# Altium PCB PCB1.PcbDoc
Units mil, origin at the board's own origin, x right, y up, seen from the top; angles counter-clockwise.
Board outline 1490 x 400 mil, 2 copper layers (Top Layer, Bottom Layer); 9 components, 7 nets, 33 pads, 2 vias.
Unrouted connection lines stored in the file: 2.
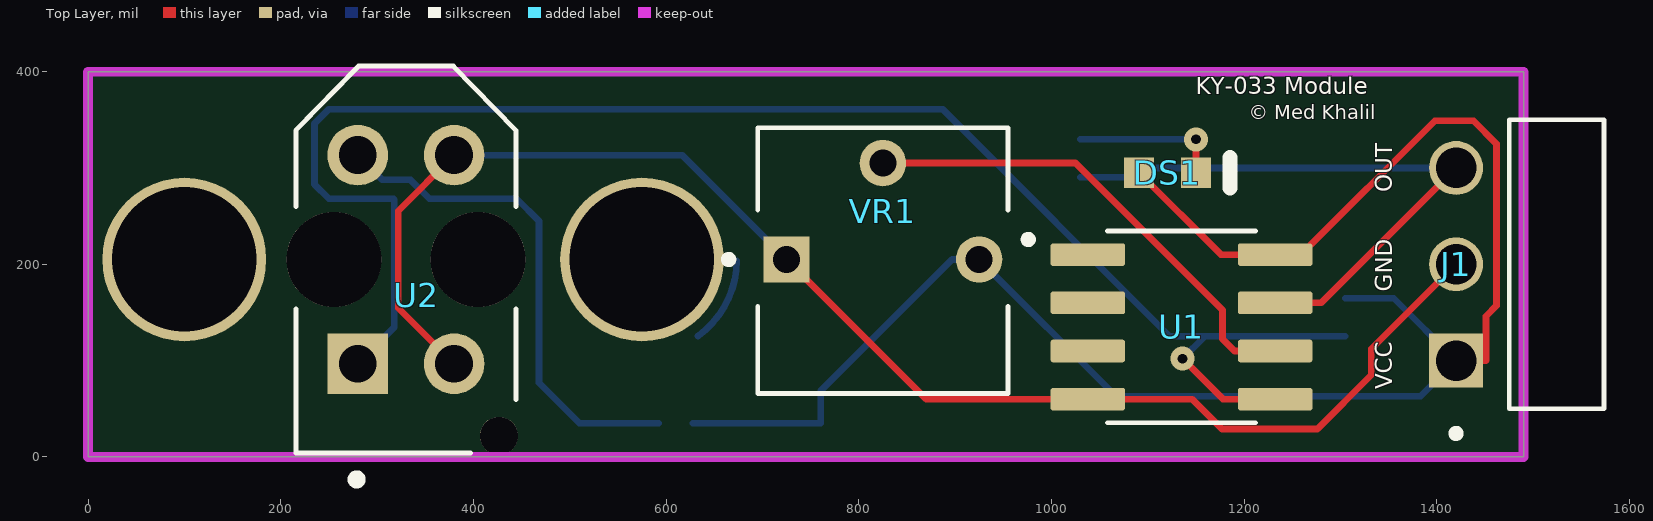
[diagram p0: Top Layer view]
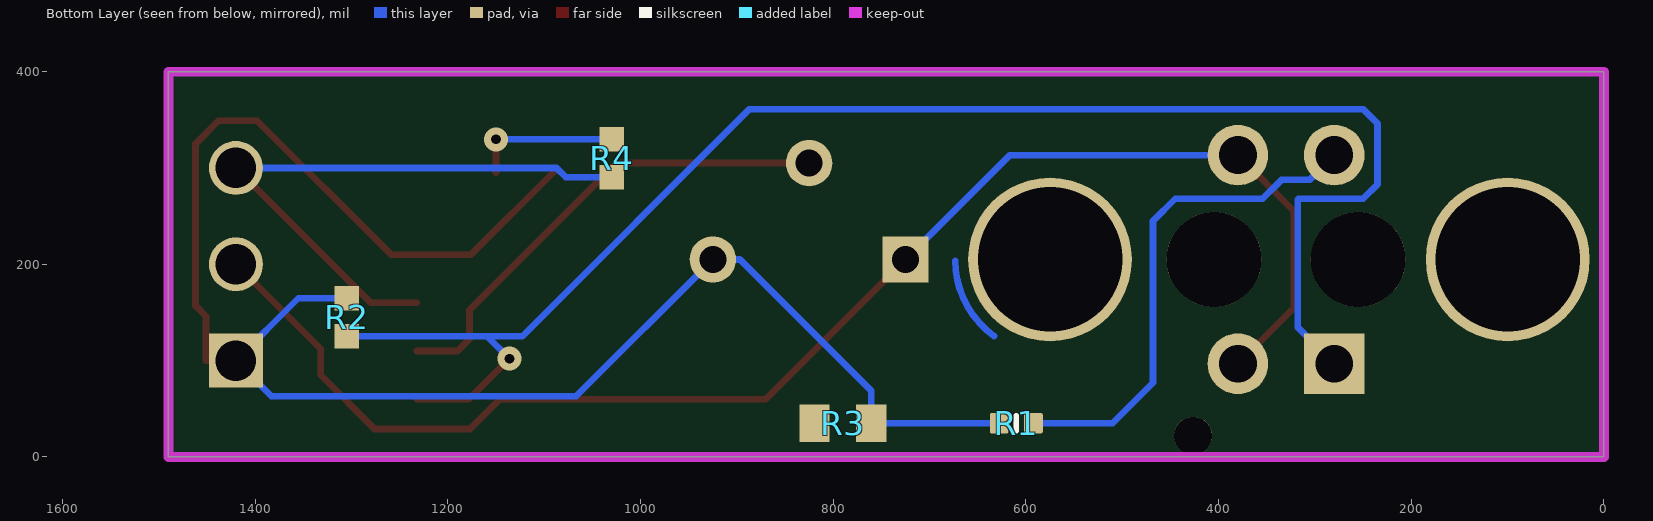
[diagram p1: Bottom Layer view, seen from below]
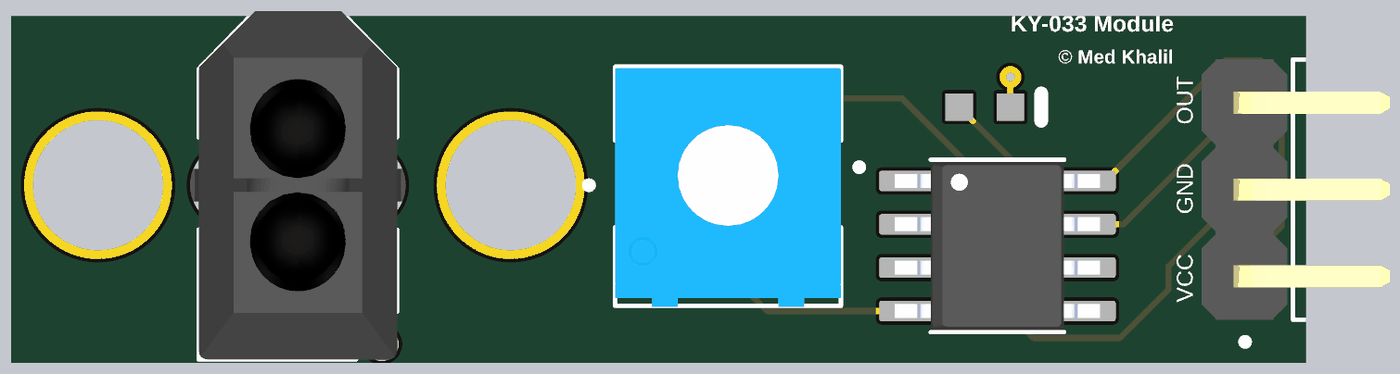
[diagram p2: 3D render of the assembled board from above, using the file's embedded part models]
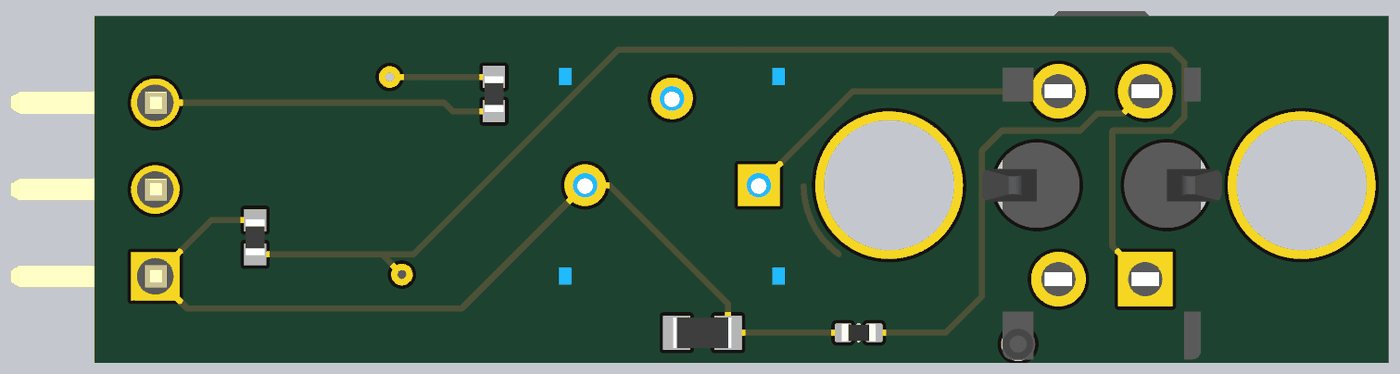
[diagram p3: 3D render of the assembled board from below, using the file's embedded part models]

## Layer stack, top to bottom
Top Solder: solder mask 0.4, Solder Resist, Dk 3.5
Top Layer: signal copper 1.4
Dielectric 1: dielectric 12.6, FR-4, Dk 4.8
Bottom Layer: signal copper 1.4
Bottom Solder: solder mask 0.4, Solder Resist, Dk 3.5

## Board outline
0,0 0,400 1490,400 1490,0

## Design rules (kind name [scope] priority, off if disabled: settings)
Clearance [All] p1: gap=10 ignorepadtopadclearanceinfootprint=FALSE
PolygonConnect [All] p1: connectstyle=Relief reliefconductorwidth=10 reliefentries=4 polygonreliefangle="90 Angle" airgapwidth=10
RoutingVias [All] p1: holewidth=10 width=25 viastyle="Through Hole" minholewidth=10 minwidth=25 maxholewidth=10 maxwidth=25
SolderMaskExpansion [All] p1: expansion=4 istentingtop=FALSE
SupplyNets "Schematic Supply Nets_1" [InNet('VCC')] p1: voltage=0.000
SupplyNets "Schematic Supply Nets" [InNet('GND')] p2: voltage=0.000
Width [All] p1: maxlimit=7 minlimit=7 preferedwidth=7 minimp=50.000000 maximp=50.000000 favimp=50.000000
30 further rules are at their usual default settings.

## Components (designator, comment, footprint, x,y, rotation, side; value= is the part's Value field where it differs from the comment)
DS1 "LTST-C190GKT" LTST-C190GKT_V 1120.47,295 r0 top
J1 "THS-03-R-RAF" VALCON_THS-03-R-RAF 1420,200 r270 top
R1 "Resistor 100R +/-1 % 0402 63 mW" RESC0402(1005)_L 610,35 r180 bottom value=100
R2 "Resistor 100k +/-1% 0402 63 mW" RESC1005X40X25ML05T05 1305,145 r90 bottom value=100k
R3 "Resistor 10k +/-1% 0603 100 mW" RESC1608X55X25ML10T15 790,35 r180 bottom value=10k
R4 "Resistor 1k +/-1% 0402 100 mW" RESC1005X40X25ML05T05 1030,310 r90 bottom value=1k
U1 "LM393D" SOIC127P599X175-8N 1135,135 r0 top
U2 "TCRT5000L" XDCR_TCRT5000L 330,205 r90 top
VR1 "3362P-1-103LF" TRIM_3362P-1-103LF 825,205 r0 top

## Footprints (in the part's own frame and the unit in brackets; to place one, negate y for a bottom-side part, rotate by r counter-clockwise, add the part's x,y. Pads: shape width x height; smd on the part's side, far side on the other; paste and mask are expansions set on the pad)
LTST-C190GKT_V [mm] "SMD, 2-Leads, Body 1.6x0.8mm"
  rect 0.8x0.8 smd: 1(-0.75,0) 2(0.75,0)
  silkscreen extent 1.65,-0.4 1.65,0.4, body extent -0.8,-0.4 0.8,0.4, height 0.9
RESC0402(1005)_L [mm] "Chip Resistor, Body 1.0x0.5mm, IPC High Density"
  rrect25% 0.5x0.55 smd: 1(-0.45,0) 2(0.45,0)
  silkscreen extent 0,-0.2 0,0.2, body extent -0.5,-0.25 0.5,0.25, height 0.3
RESC1005X40X25ML05T05 [mm] "Chip Resistor, 2-Leads, Body 1.05x0.55mm, IPC Low Density"
  rect 0.65x0.65 smd: 1(-0.5,0) 2(0.5,0)
  body extent -0.53,-0.28 0.53,0.28, height 0.4
RESC1608X55X25ML10T15 [mm] "Chip Resistor, 2-Leads, Body 1.70x0.90mm, IPC Low Density"
  rect 0.8x1 smd: 1(-0.75,0) 2(0.75,0)
  body extent -0.85,-0.45 0.85,0.45, height 0.55
SOIC127P599X175-8N [mm]
  rrect25% 1.97x0.6 smd: 1(-2.47,1.905) 2(-2.47,0.635) 3(-2.47,-0.635) 4(-2.47,-1.905) 5(2.47,-1.905) 6(2.47,-0.635) 7(2.47,0.635) 8(2.47,1.905)
  silkscreen extent -4.14,-2.53 1.95,2.53, body extent -3,-2.45 3,2.45, height 1.75
TRIM_3362P-1-103LF [mil]
  rect 48.11x48.11 hole 28.11: 1(-100,0)
  round 48.11 hole 28.11: 2(0,100) 3(100,0)
  silkscreen extent -164,-139 130,137, body extent -130,-140 130,135, height 170
VALCON_THS-03-R-RAF [mm]
  rect 1.42x1.42 hole 1.07: 01(2.54,0)
  round 1.42 hole 1.07: 02(0,0) 03(-2.54,0)
  silkscreen extent -3.81,-0.1 4.56,3.9, body extent -3.81,-1.27 3.81,4.23, height 4.23
XDCR_TCRT5000L [mm]
  rect 1.6x1.6 hole 1: 1(-2.75,1.27)
  round 1.6 hole 1: 2(-2.75,-1.27) 3(2.75,-1.27) 4(2.75,1.27)
  round 1 hole 1 unplated: ""(-4.65,-2.45)
  round 2.5 hole 2.5 unplated: ""(0,1.9) ""(0,-1.9)
  silkscreen extent -5.92,-2.9 5.1,2.9, body extent -5.1,-3.5 5.1,3.5, height 6.71

## Part data
DS1: library part CMP-007-00022-2, "LED Uni-Color Green, 100 mW, 30 mA, -55 to 85 degC, 2-Pin SMD, RoHS, Tape and Reel", Case/Package=0603, Colour=Green, Forward Current=20mA, Forward Voltage=2.1V, Manufacturer=Lite-On, Max Operating Temperature=85°C, Min Operating Temperature=-55°C, Package Description="2-Pin Surface Mount Device, Body 1.6 x 0.8 mm", Package Quantity=3000, Package Reference=C190GKT, Power=100mW, Datasheet URL=http://datasheet.octopart.com/LTST-C190GKT-Lite-On-datasheet-158530.pdf, Datasheet Version=Dec-06, Illumination Colour=Green, Lens Style=Clear, Luminous Intensity=6mcd, Manufacturer URL=http://www.us.liteon.com/, Mounting Technology=SM, Nominal Vf=2.1V, Packaging=TapeandReel, Pins=2, RoHS Compliant=True, Viewing Angle=130degrees
J1: Package=None, Availability=Unavailable, MP=THS-03-R-RAF, Price=None
R1: library part CMP-009-00167-3, "Chip Resistor, 100 Ohms, +/-1 %, 63 mW, -55 to 155 degC, 0402", Case/Package=0402, Max Operating Temperature=155°C, Min Operating Temperature=-55°C, Power=63mW, Tolerance=1%, Pins=2
R2: library part CMP-009-00021-5, "Chip Resistor, 100 KOhm, +/- 1%, 0.063 W, -55 to 155 degC, 0402 (1005 Metric)", Case/Package=0402, Max Operating Temperature=155°C, Min Operating Temperature=-55°C, Power=63mW, Tolerance=1%, Voltage Rating=50V, Mounting Technology=SM, Pins=2, RoHS Compliant=True
R3: library part CMP-009-00017-5, "Chip Resistor, 10 KOhm, +/- 1%, 01 W, -55 to 155 degC, 0603 (1608 Metric)", Case/Package=0603, Max Operating Temperature=155°C, Min Operating Temperature=-55°C, Power=100mW, Tolerance=1%, Voltage Rating=50V, Mounting Technology=SM, Pins=2, RoHS Compliant=True
R4: library part CMP-009-00009-5, "Chip Resistor, 1 KOhm, +/- 1%, 0.1 W, -55 to 155 degC, 0402 (1005 Metric)", Case/Package=0402, Max Operating Temperature=155°C, Min Operating Temperature=-55°C, Power=100mW, Tolerance=1%, Voltage Rating=50V, Mounting Technology=SM, Pins=2, RoHS Compliant=True
U1: "Dual differential comparator, commercial grade", Package="SOIC-8 Texas Instruments", Availability="In Stock", Check_prices=https://www.snapeda.com/parts/LM393D/Texas+Instruments/view-part/?ref=eda, MF="Texas Instruments", MP=LM393D, Price=None, Purchase-URL=https://pricing.snapeda.com/search/part/LM393D/?ref=eda, SnapEDA_Link=https://www.snapeda.com/parts/LM393D/Texas+Instruments/view-part/?ref=snap
U2: "Reflective Optical Sensor 0.591 _15mm_ PCB Mount", Package="PCB Mount Vishay Semiconductor", Availability=Unavailable, MF=Vishay, MP=TCRT5000L, Price=None, SnapEDA_Link=https://www.snapeda.com/parts/TCRT5000L/Vishay%20Semiconductor%20Opto%20Division/view-part/229608/?ref=snap
VR1: "10 kOhms 0.5W, 1/2W PC Pins Through Hole Trimmer Potentiometer Cermet 1 Turn Top Adjustment", Package="3116 Bourns", Check_prices=https://www.snapeda.com/parts/3362P-1-103LF/Bourns/view-part/13764/?ref=eda, Digi-Key_Part_Number=3362P-103LF-ND, MF=Bourns, MP=3362P-1-103LF, Purchase-URL=https://pricing.snapeda.com/search/part/3362P-1-103LF/?ref=eda, SnapEDA_Link=https://www.snapeda.com/parts/3362P-1-103LF/Bourns/view-part/13764/?ref=snap

## Free pads (board coordinates)
  round 170 hole 150: 10(100,205) 10(575,205)

## Via types
v1: diameter 25, hole 10, Top Layer to Bottom Layer, 2 vias

## Nets (pads, with @x,y where several pads share a name; then routed paths per layer and width w, separated by ;. In a path a pad name is that pad's centre, name@x,y a point inside that pad or via, vN(x,y) a via of type N, cw(c..) or ccw(c..) an arc to the next point about the centre after c; other vN are vias at no path point)
A1: R2.1 U1.5 U2.1 | length 1659.1
  Top Layer w7: v1(1136,102) 1178,60 U1.5
  Bottom Layer w7: U2.1 318,134.73 318,267 317,268 250,268 235,283 235,346 250,361 887,361 1122.68,125.32 1159.32,125.32 ; v1(1136,102) 1159.32,125.32 ; R2.1 1159.32,125.32
GND: J1.02 U1.4 U2.2 U2.3 VR1.1 | length 1509
  Top Layer w7: U2.2 322,154.73 322,255.27 U2.3 ; VR1.1 870,60 U1.4 1146,60 1177,29 1276,29 1332,85 1332,112 J1.02
  Bottom Layer w7: U2.3 616.73,313.27 VR1.1
NetDS1_2: DS1.2 R4.2 | length 154.7
  Top Layer w7: DS1.2 v1(1150,329.69)
  Bottom Layer w7: R4.2 v1(1150,329.69)
NetR1_2: R1.2 U2.4 | length 526
  Bottom Layer w7: U2.4 305.61,287.66 334.91,287.66 354.57,268 445,268 468,245 468,77 510,35 R1.2
OUT: J1.03 R3.1 R4.1 U1.7 | length 730.9
  Top Layer w7: U1.7 1280,160 J1.03
  Bottom Layer w7: 633.21,125.54 ccw(c575,205) 673.49,203.66 ; R4.1 1077.54,290.32 1087.22,300 J1.03
POT: U1.6 VR1.2 | length 505.6
  Top Layer w7: VR1.2 1025,305 1177.5,152.5 1177.5,122.5 1190,110 U1.6
VCC: DS1.1 J1.01 R1.1 R2.2 R3.2 U1.8 VR1.3 | length 1832.6
  Top Layer w7: DS1.1 1175.94,210 U1.8 1259,210 1398,349 1438,349 1462,325 1462,157 1451,146 1451,100 J1.01
  Bottom Layer w7: R1.1 R3.2 760.47,68.47 897,205 VR1.3 1067,63 1383,63 J1.01 1355.31,164.69 R2.2
pads on no net: U1.1 U1.2 U1.3 U2.

## Keep-outs
Keep-Out Layer:
  the board outline again, w10

## Silkscreen, mask and mechanical layers (free items; w line width, h text height)
Top Overlay:
  text "KY-033 Module" at 1150,370.72 h30
  text "© Med Khalil" at 1205,345.39 h25
  text "OUT" at 1359.67,275 h30 r90
  text "GND" at 1359.67,171.66 h30 r90
  text "VCC" at 1359.67,70.03 h30 r90